# EAGLE board keypad_socket_a (EAGLE 6.2)
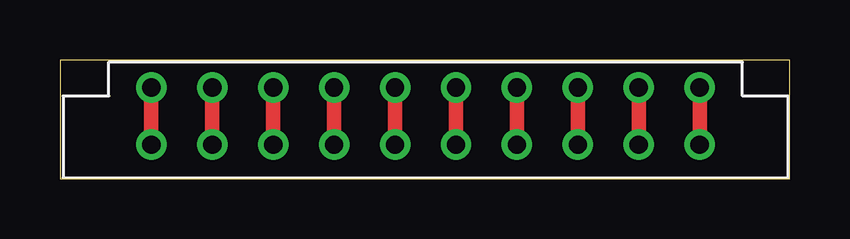
[diagram p0: board, top side]

Size 30.43 x 4.95 mm. Coordinates in mm from the lower left corner, seen from the top.
Outline: 0,0 30.43,0 30.43,4.95 0,4.95 0,0
Copper layers (1*16): Top 0.035mm / dielectric 1.5mm / Bottom 0.035mm
Design rules: minimum track width 10mil, minimum drill 24mil, track to track 8mil, track to pad 8mil, pad to pad 8mil, via to via 8mil, smd to smd 8mil, copper to edge 40mil, drill to drill 8mil, minimum pad ring 10mil, minimum via ring 8mil, stop-mask expansion 4mil, vias tented up to drill 0mil, thermal gap 10mil

## Footprints (pad centres in the part's own frame; a part is rotated, then mirrored left to right if it is on the bottom)
6-520315-0 = drill 0.762: 1 -11.43,0; 2 -8.89,0; 3 -6.35,0; 4 -3.81,0; 5 -1.27,0; 6 1.27,0; 7 3.81,0; 8 6.35,0; 9 8.89,0; 10 11.43,0
22AWG_10POS = drill 0.762: 1 -11.43,0; 2 -8.89,0; 3 -6.35,0; 4 -3.81,0; 5 -1.27,0; 6 1.27,0; 7 3.81,0; 8 6.35,0; 9 8.89,0; 10 11.43,0

## Placement (x,y rotation side)
J1  6-520315-0  [6-520315-0]  15.24,1.42 0 top
J2  22AWG_10POS  [22AWG_10POS]  15.24,3.81 0 top

## Library data of the parts
J1 = nest_interface; DIGIKEY: 6-520315-0-ND
J2 = nest_interface

## Nets
N$2: J1.1 J2.1
N$3: J1.10 J2.10
N$4: J1.2 J2.2
N$5: J1.3 J2.3
N$6: J1.4 J2.4
N$7: J1.5 J2.5
N$8: J1.6 J2.6
N$9: J1.7 J2.7
N$10: J1.8 J2.8
N$11: J1.9 J2.9

## Tracks (layer width: path | path; a pad name or v marks a point on that pad's centre or on a via)
N$2
  Top 0.61: J1.1 J2.1
N$3
  Top 0.61: J1.10 J2.10
N$4
  Top 0.61: J1.2 J2.2
N$5
  Top 0.61: J1.3 J2.3
N$6
  Top 0.61: J1.4 J2.4
N$7
  Top 0.61: J1.5 J2.5
N$8
  Top 0.61: J2.6 J1.6
N$9
  Top 0.61: J1.7 J2.7
N$10
  Top 0.61: J2.8 J1.8
N$11
  Top 0.61: J2.9 J1.9